# EAGLE board deviceoutlet (EAGLE 5.00)
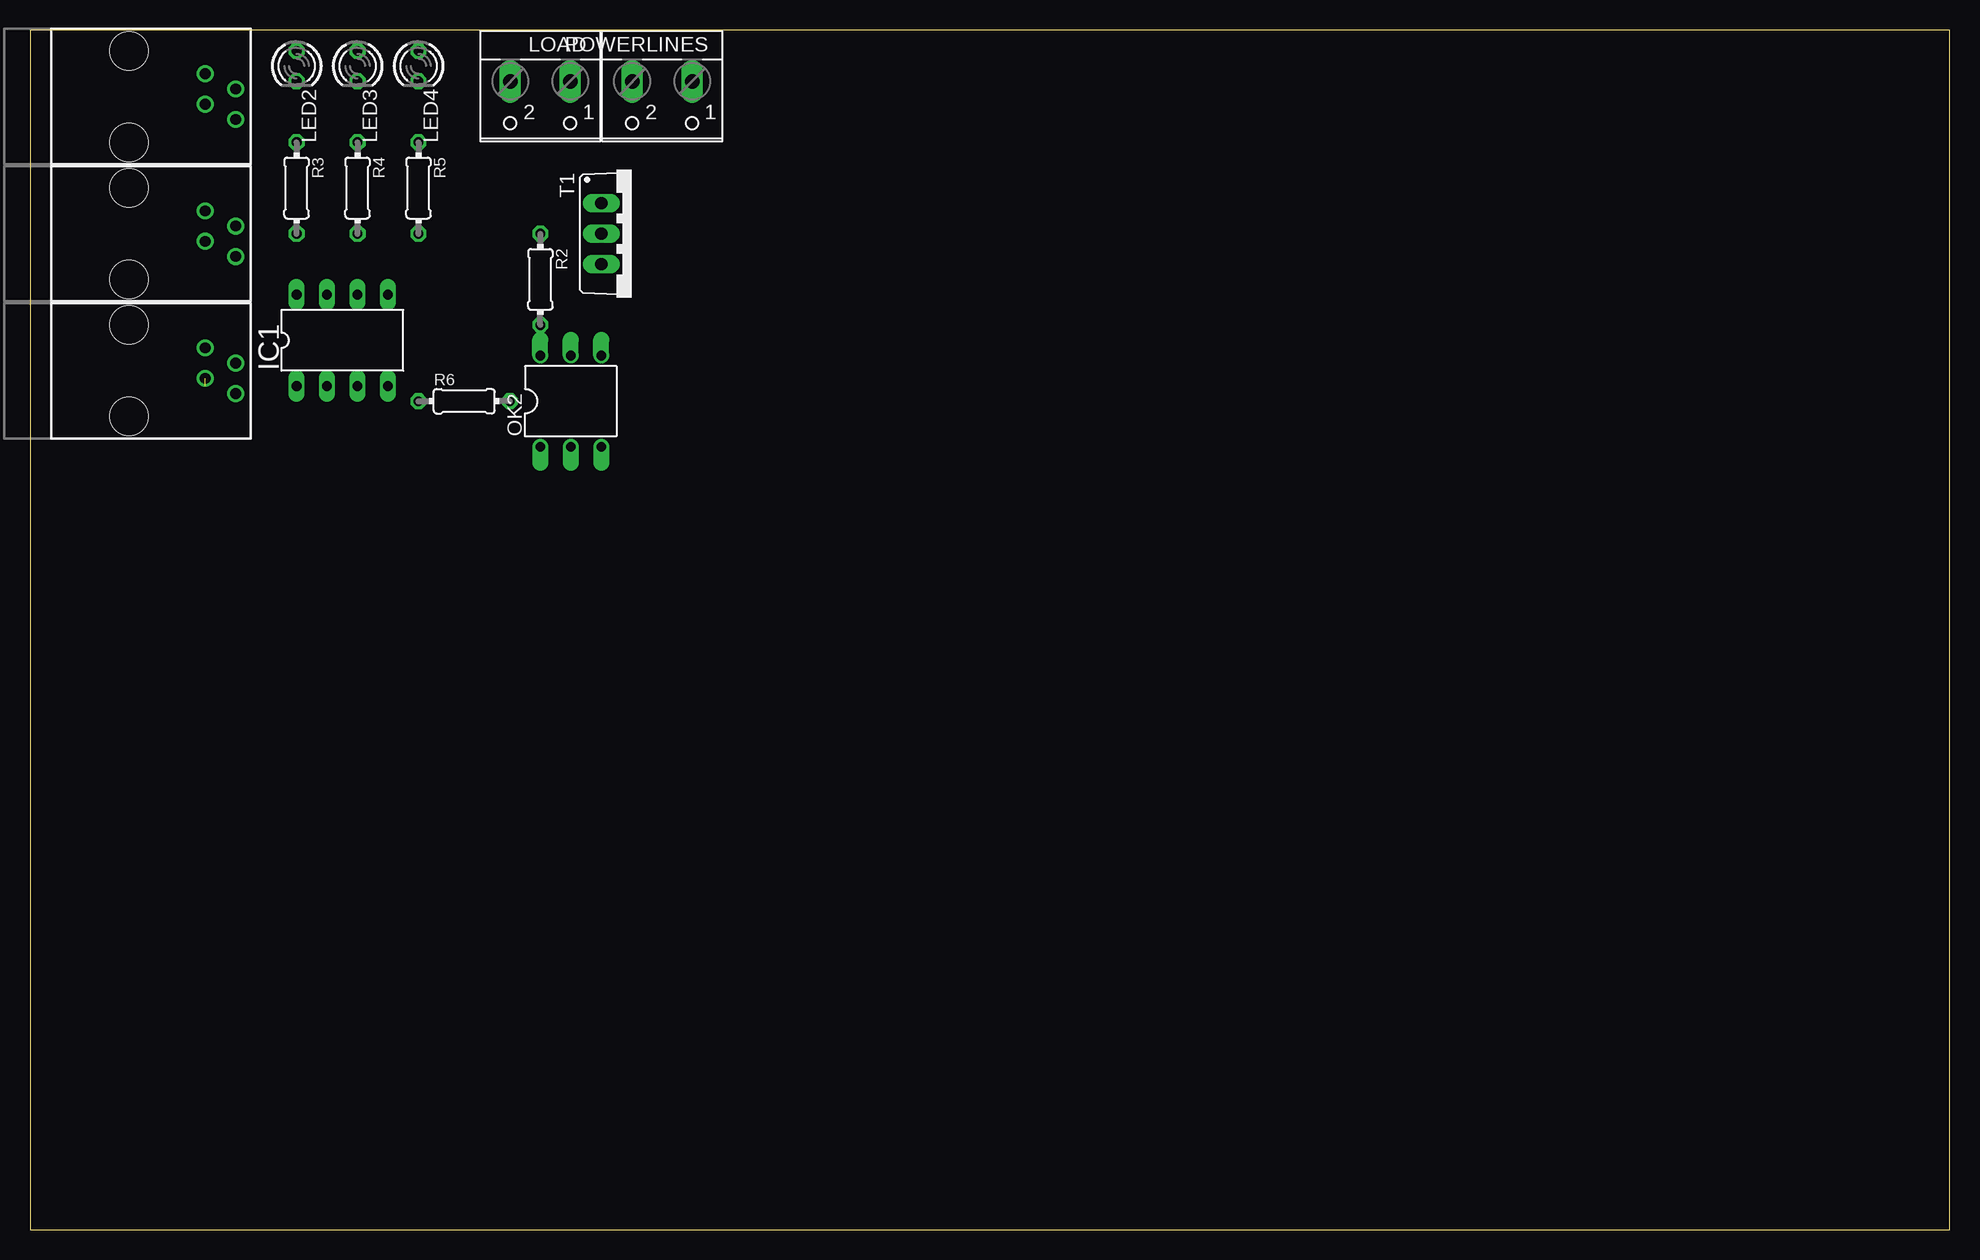
[diagram p0: board, top side]
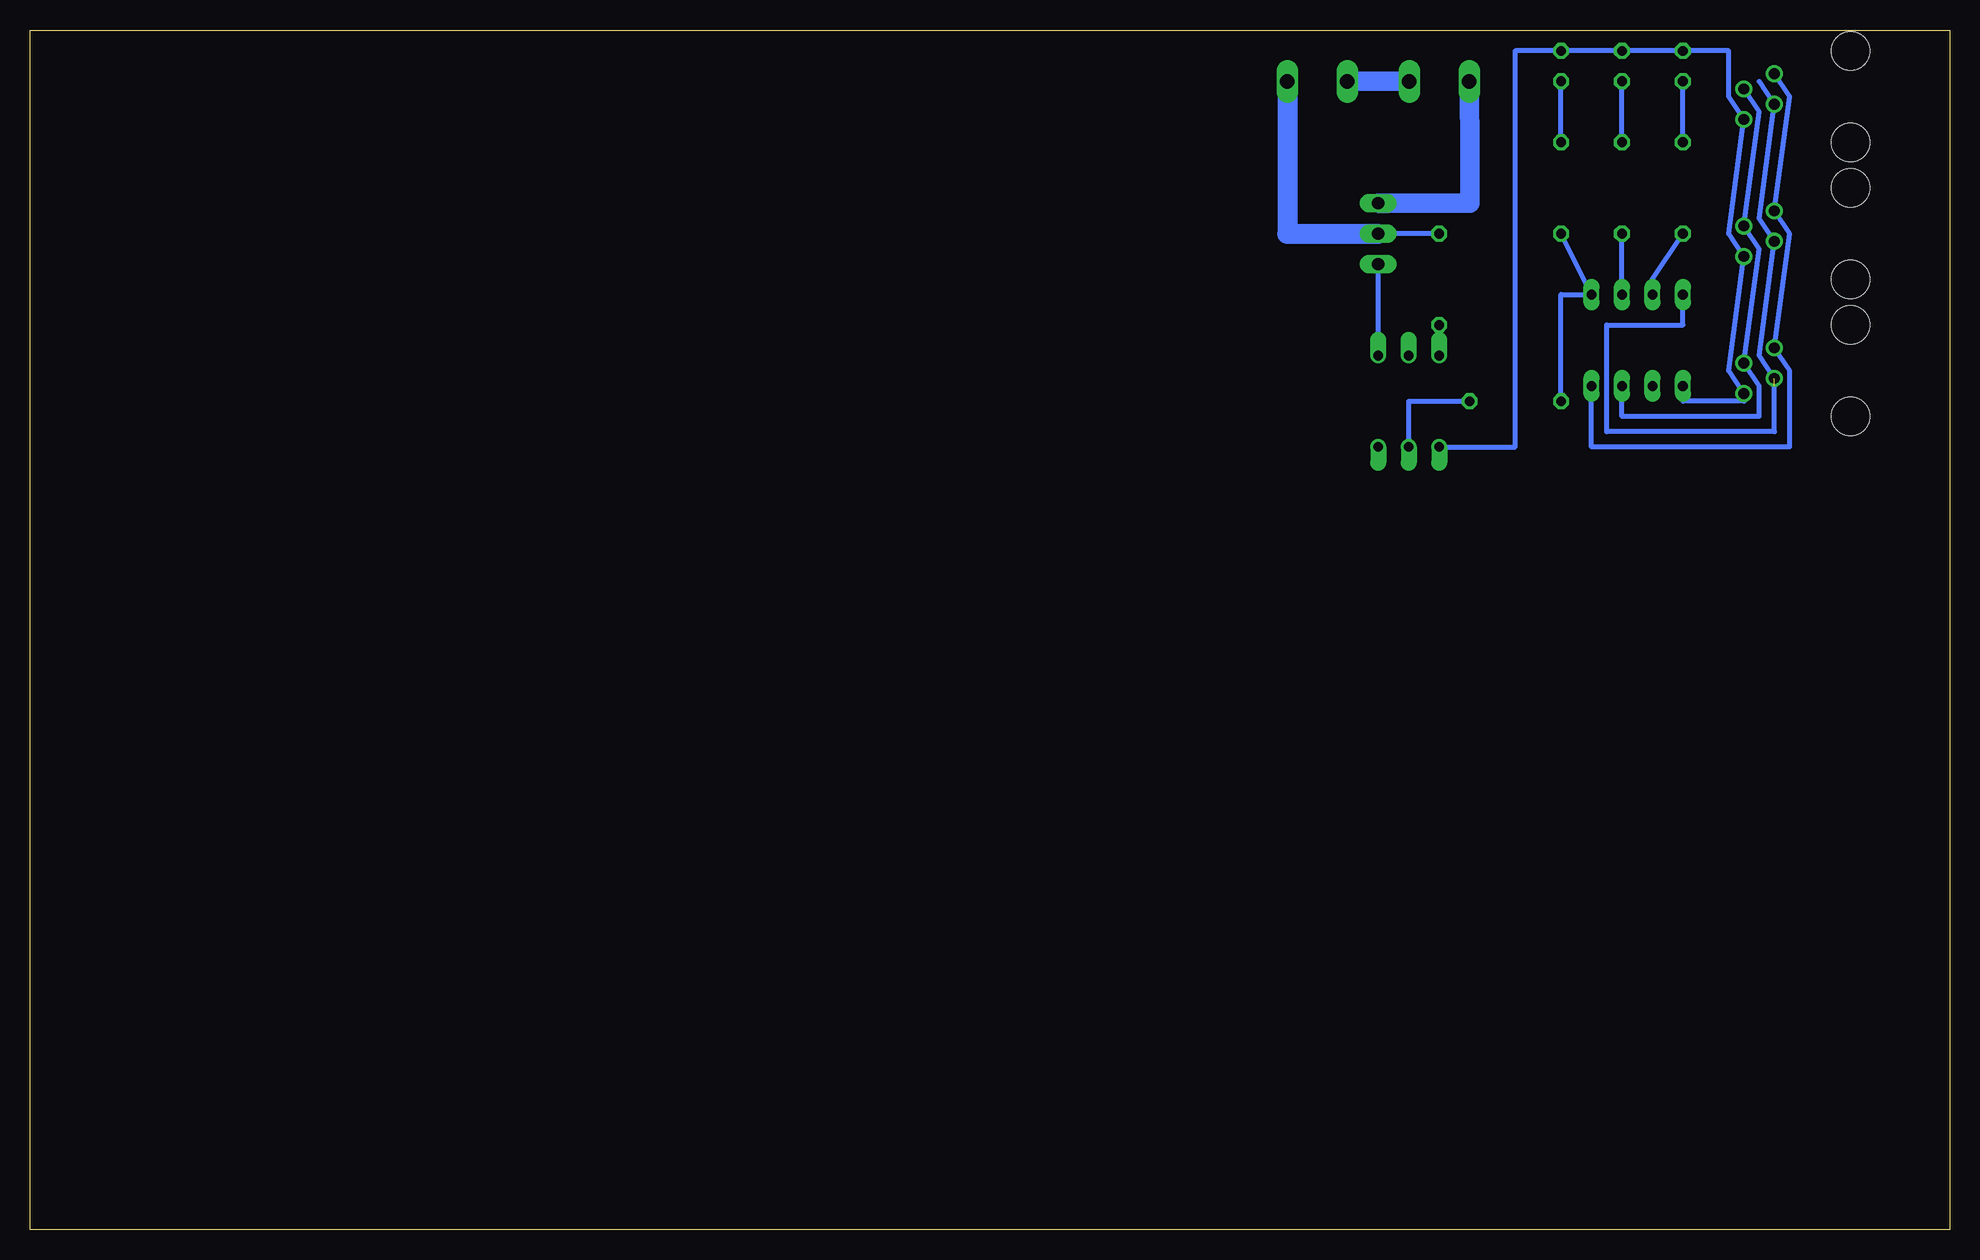
[diagram p1: board, bottom side, seen from below]

Size 160 x 100 mm. Coordinates in mm from the lower left corner, seen from the top.
Outline: 0,0 160,0 160,100 0,100 0,0
Copper layers (1*16): Top 0.035mm / dielectric 1.5mm / Bottom 0.035mm
Design rules "default": minimum track width 10mil, minimum drill 24mil, track to track 8mil, track to pad 8mil, pad to pad 8mil, via to via 8mil, smd to smd 8mil, copper to edge 40mil, drill to drill 8mil, minimum pad ring 10mil, minimum via ring 8mil, stop-mask expansion 4mil, vias tented up to drill 0mil, thermal gap 10mil

## Footprints (pad centres in the part's own frame; a part is rotated, then mirrored left to right if it is on the bottom)
DIL8 = drill 0.813 long: 1 -3.81,-3.81; 2 -1.27,-3.81; 3 1.27,-3.81; 4 3.81,-3.81; 5 3.81,3.81; 6 1.27,3.81; 7 -1.27,3.81; 8 -3.81,3.81
LED3MM = drill 0.813 octagon: A -1.27,0; K 1.27,0
W237-102 = drill 1.194 long: 1 -2.5,-1.27; 2 2.5,-1.27
DIL06 = drill 0.813 offset: 1 -2.54,-3.81; 2 0,-3.81; 3 2.54,-3.81; 4 2.54,3.81; 5 0,3.81; 6 -2.54,3.81
0204/7 = drill 0.813 octagon: 1 -3.81,0; 2 3.81,0
TO220BV = drill 1.016 long: G 2.54,-2.54; T1 -2.54,-2.54; T2 0,-2.54
RJ9 = drill 0.889 round: 1 -1.905,6.35; 2 -0.635,8.89; 3 0.635,6.35; 4 1.905,8.89 | hole 3.2: -3.81,0; 3.81,0

## Placement (x,y rotation side)
IC1  PIC12F629P  [DIL8]  26.03,74.13 0 top
LED2  [LED3MM]  22.22,96.99 270 top
LED3  [LED3MM]  27.3,96.99 270 top
LED4  [LED3MM]  32.38,96.99 270 top
LOAD  [W237-102]  42.54,94.45 180 top
OK2  IL420  [DIL06]  45.08,69.05 0 top
POWERLINES  [W237-102]  52.7,94.45 180 top
R2  1K  [0204/7]  42.54,79.21 270 top
R3  220  [0204/7]  22.22,86.83 270 top
R4  220  [0204/7]  27.3,86.83 270 top
R5  220  [0204/7]  32.38,86.83 270 top
R6  220  [0204/7]  36.19,69.05 0 top
T1  BT138-V  [TO220BV]  50.16,83.02 270 top
U$2  RJ9PTH  [RJ9]  8.25,83.02 270 top
U$4  RJ9PTH  [RJ9]  8.25,71.59 270 top
U$5  RJ9PTH  [RJ9]  8.25,94.45 270 top

## Library data of the parts
IC1 = microchip
LED2-LED4 = led
LOAD POWERLINES = con-wago-500
OK2 = optocoupler
R2-R6 = resistor
T1 = triac
U$2 U$4 U$5 = SparkFun

## Nets
N$1: IC1.3 U$2.2 U$4.2 U$5.2
N$2: IC1.5 R5.2 R6.1
N$3: LOAD.1 POWERLINES.2
N$4: LOAD.2 T1.T1
N$5: IC1.7 R3.2
N$6: OK2.6 R2.2
N$7: IC1.8 U$2.3 U$4.3 U$5.3
N$8: IC1.1 LED2.A LED3.A LED4.A OK2.1 U$2.4 U$4.4 U$5.4
N$9: IC1.4 U$2.1 U$4.1 U$5.1
N$10: OK2.4 T1.G
N$14: IC1.6 R4.2
N$15: LED2.K R3.1
N$16: LED3.K R4.1
N$17: LED4.K R5.1
N$18: POWERLINES.1 R2.1 T1.T2
N$19: OK2.2 R6.2

## Tracks (layer width: path | path; a pad name or v marks a point on that pad's centre or on a via)
N$1
  Bottom 0.406: U$5.2 15.87,93.18 U$2.2 15.87,81.75 U$4.2 15.87,70.32 15.87,67.78 27.3,67.78 IC1.3
N$2
  Bottom 0.406: R5.2 IC1.5 32.38,77.94 R6.1
N$3
  Bottom 1.626: LOAD.1 POWERLINES.2
N$4
  Bottom 1.626: LOAD.2 40,89.37 40,85.56 T1.T1
N$5
  Bottom 0.406: R3.2 24.76,79.21 IC1.7
N$6
  Bottom 0.406: OK2.6 R2.2
N$7  (1 unrouted)
  Bottom 0.406: U$4.3 15.87,72.86 U$2.3 15.87,84.29 U$5.3 15.87,95.72 | IC1.8 22.22,75.4 28.57,75.4 28.57,66.51 14.6,66.51 14.6,70.32
N$8
  Bottom 0.406: IC1.1 22.22,69.05 17.14,69.05 U$4.4 18.41,71.59 U$2.4 18.41,83.02 U$5.4 18.41,94.45 18.41,98.26 LED2.A LED3.A LED4.A 36.19,98.26 36.19,65.24 OK2.1
N$9
  Bottom 0.406: U$5.1 13.33,94.45 U$2.1 13.33,83.02 U$4.1 13.33,71.59 13.33,65.24 29.84,65.24 IC1.4
N$10
  Bottom 0.406: OK2.4 T1.G
N$14
  Bottom 0.406: IC1.6 R4.2
N$15
  Bottom 0.406: R3.1 LED2.K
N$16
  Bottom 0.406: R4.1 LED3.K
N$17
  Bottom 0.406: R5.1 LED4.K
N$18
  Bottom 0.406: R2.1 T1.T2
  Bottom 1.676: POWERLINES.1 55.2,83.02 T1.T2
N$19
  Bottom 0.406: OK2.2 45.08,69.05 R6.2